# Altium PCB 6C-2L-1550um.PcbDoc
Units mm, origin at the board's own origin, x right, y up, seen from the top; angles counter-clockwise.
Board outline 30 x 15 mm, 2 copper layers (Top Layer, Bottom Layer), stack 1.586 mm thick; 3 components, 4 nets, 12 pads, 0 vias.
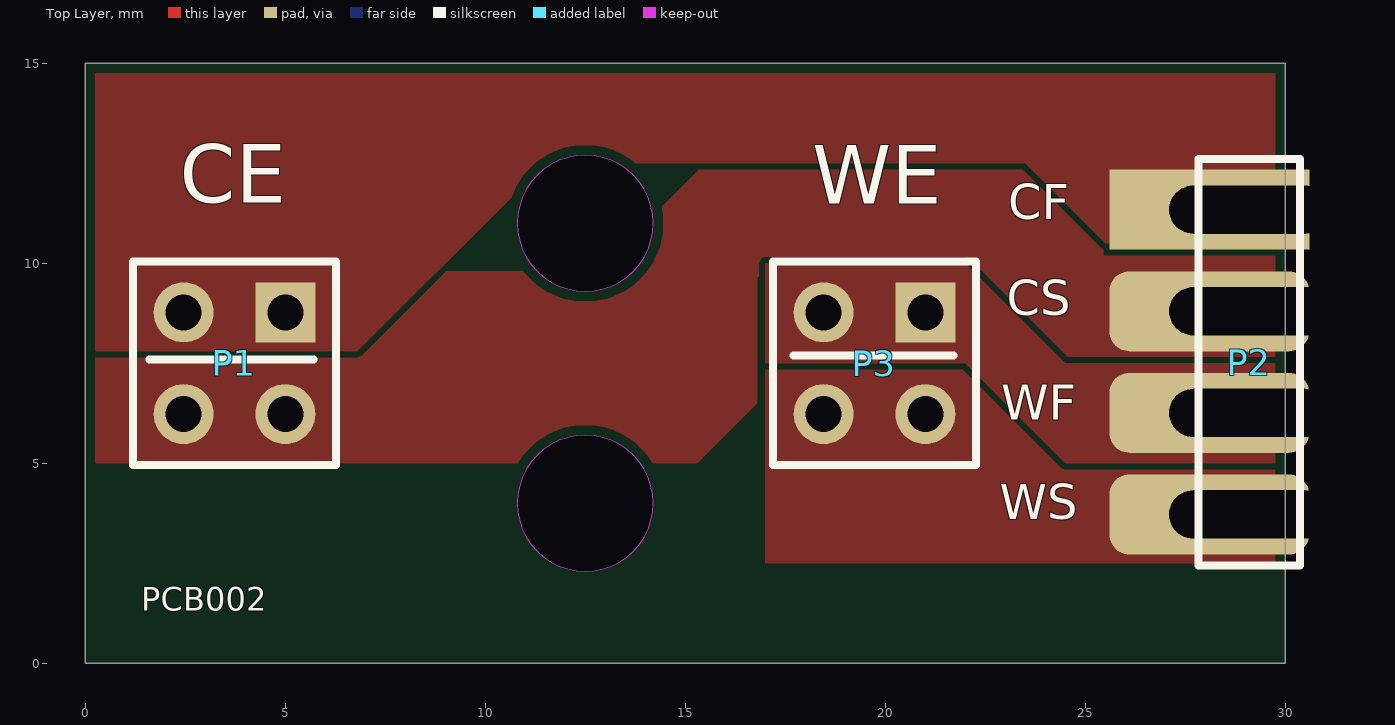
[diagram p0: Top Layer view]
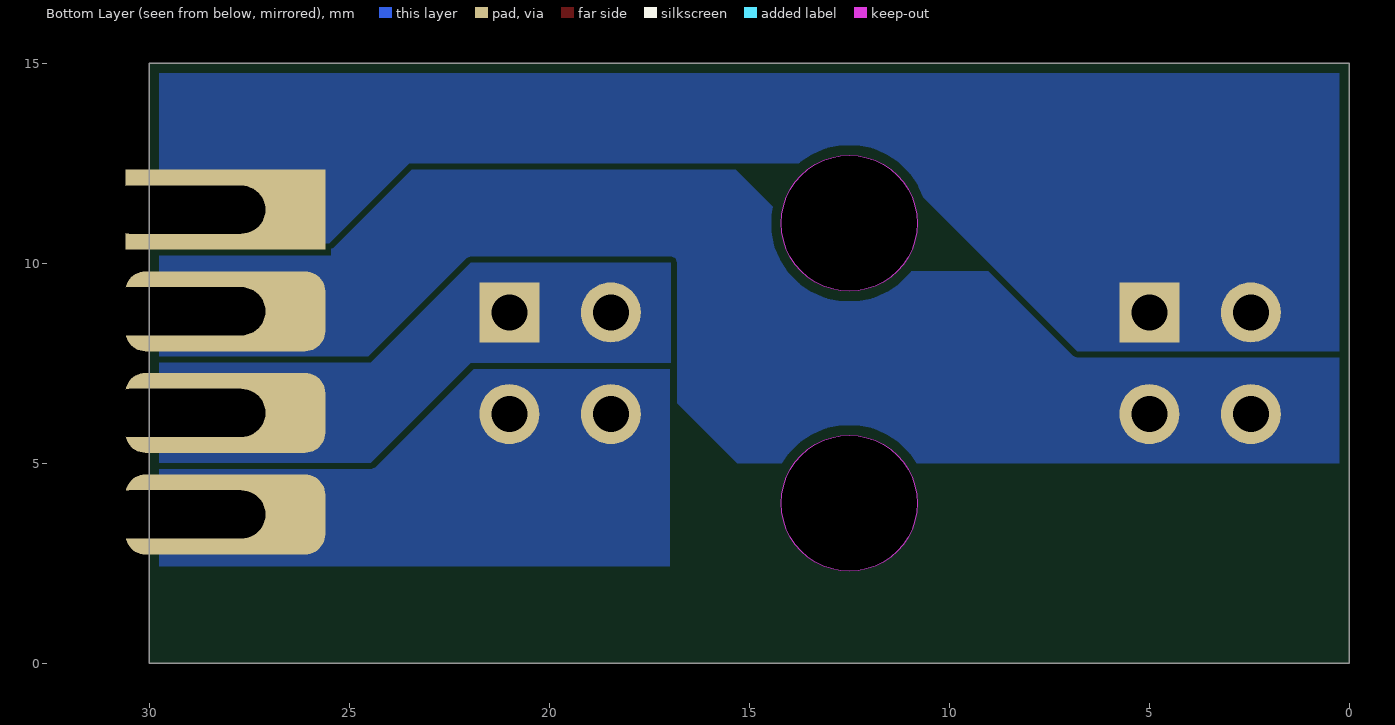
[diagram p1: Bottom Layer view, seen from below]

## Layer stack, top to bottom
Top Solder: solder mask 0.0102, Solder Resist, Dk 3.5
Top Layer: signal copper 0.018
Dielectric1: core 1.55, FR-4, Dk 4.8
Bottom Layer: signal copper 0.018
Bottom Solder: solder mask 0.0102, Solder Resist, Dk 3.5

## Board outline
0,0 30,0 30,15 0,15
cut-out: 10.8,11 ccw(c12.5,11) 12.5,9.3 ccw(c12.5,11) 14.2,11 ccw(c12.5,11) 12.5,12.7 ccw(c12.5,11)
cut-out: 10.8,4 ccw(c12.5,4) 12.5,2.3 ccw(c12.5,4) 14.2,4 ccw(c12.5,4) 12.5,5.7 ccw(c12.5,4)

## Design rules (kind name [scope] priority, off if disabled: settings)
BoardOutlineClearance [All] p1: gap=0.25 ignorepadtopadclearanceinfootprint=FALSE except(0: Arc-SplitContinuation Track-SplitContinuation SMDPad-SplitContinuation THPad-SplitContinuation Via-SplitContinuation Fill-SplitContinuation Poly-SplitContinuation Region-SplitContinuation Text-SplitContinuation)
Clearance Clearance-xPP-xTP-xTT [All] p1: gap=0.15 ignorepadtopadclearanceinfootprint=FALSE except(0: Arc-Hole Track-Hole SMDPad-Hole THPad-Hole Via-Hole Fill-Hole Poly-Hole Region-Hole Text-Hole)
ComponentClearance [All] p1: gap=0.25 collisioncheckmode=3 verticalgap=0.25 showdistances=FALSE
DiffPairsRouting [All] p1: maxlimit=0.25 minlimit=0.25 mostfreqgap=0.25 toplayer_minwidth=0.381 toplayer_maxwidth=0.381 toplayer_prefwidth=0.381 bottomlayer_minwidth=0.381 bottomlayer_maxwidth=0.381 bottomlayer_prefwidth=0.381 maxuncoupledlength=12.5
Height [All] p1: minheight=0 maxheight=25 prefheight=12.5
HoleSize HoleSize-PTH [All] p1: absolutevalues=TRUE maxlimit=2 minlimit=0.25 maxpercent=80.000 minpercent=20.000
HoleToHoleClearance [All] p1: gap=0.35 allowstackedmicrovias=TRUE
MinimumAnnularRing "Minimum IAR  >0.45mm" [((ObjectKind = 'Pad') OR (ObjectKind = 'Via')) And (Layer = 'MultiLayer') And (HoleDiameter > AsMM(0.45))] p1: minimumring=0.175 // minimum inner annular ring for pads > 0.45mm finished hole size
MinimumAnnularRing "Minimum IAR <=0.45mm" [((ObjectKind = 'Pad') OR (ObjectKind = 'Via')) And (Layer = 'MultiLayer') And (HoleDiameter <= AsMM(0.45))] p2: minimumring=0.175 // minimum inner annular ring for pads <= 0.45mm finished hole size
MinimumSolderMaskSliver [All] p1: minsoldermaskwidth=0.08
PlaneClearance PlaneClearance-IPI [All] p1: clearance=0.25
PlaneConnect [All] p1: planeconnectstyle=Relief reliefexpansion=0.175 reliefentries=4 reliefconductorwidth=0.2 reliefairgap=0.2
PolygonConnect PolygonConnect-xTW [All] p1: connectstyle=Direct reliefconductorwidth=0.2 reliefentries=4 polygonreliefangle="90 Angle" airgapwidth=0.2
RoutingCorners [All] p1: cornerstyle=45-Degree minsetback=2.5 maxsetback=2.5
RoutingVias "RoutingVias > 0.45mm" [(ObjectKind = 'Via') And (HoleDiameter > AsMM(0.45))] p1: holewidth=0.5 width=0.85 viastyle="Through Hole" minholewidth=0.5 minwidth=0.85 maxholewidth=0.9 maxwidth=1.25 // finishet hole size > 0.45mm
RoutingVias "RoutingVias <= 0.45mm" [(ObjectKind = 'Via') And (HoleDiameter <= AsMM(0.45))] p2: holewidth=0.3 width=0.65 viastyle="Through Hole" minholewidth=0.25 minwidth=0.6 maxholewidth=0.45 maxwidth=0.8 // finishet hole size <= 0.45mm
SilkToSilkClearance [All] p1: silktosilkclearance=0.2
SilkToSolderMaskClearance SilkscreenOverComponentPads [IsPad] p1: minsilkscreentomaskgap=0.2 clearancetoexposedcopper=TRUE
SolderMaskExpansion [All] p1: expansion=0 istentingtop=FALSE
UnRoutedNet [All] p1: checkbadconnections=TRUE
Width Width-xTW [All] p1: maxlimit=1.5 minlimit=0.15 preferedwidth=0.2
18 further rules are at their usual default settings.

## Components (designator, comment, footprint, x,y, rotation, side; value= is the part's Value field where it differs from the comment)
P1 "Header 2X2" HDR2X2 5,8.77 r180 top
P2 "Header 4" HDR1X4 29.1,11.34 r270 top
P3 "Header 2X2" HDR2X2 21,8.77 r180 top

## Footprints (in the part's own frame and the unit in brackets; to place one, negate y for a bottom-side part, rotate by r counter-clockwise, add the part's x,y. Pads: shape width x height; smd on the part's side, far side on the other; paste and mask are expansions set on the pad)
HDR1X4 [mm] "Connector; Header; 4 Position"
  rect 2x5 hole 1.2 slot 4 at 90 deg copper offset 0,-1: 1(0,0)
  rrect50% 2x5 hole 1.2 slot 4 at 90 deg copper offset 0,-1: 2(2.54,0) 3(5.08,0) 4(7.62,0)
  silkscreen extent -1.27,-1.27 8.89,1.27
HDR2X2 [mm] "Connector; Header; 2x2 Position"
  rect 1.5x1.5 hole 0.9: 1(0,0)
  round 1.5 hole 0.9: 2(0,2.54) 3(2.54,0) 4(2.54,2.54)
  silkscreen extent -1.27,-1.27 3.81,3.81

## Part data
P1 P3: "Header, 2-Pin, Dual row", LatestRevisionDate=17-Jul-2002, LatestRevisionNote="Re-released for DXP Platform.", Publisher="Altium Limited"
P2: "Header, 4-Pin", LatestRevisionDate=17-Jul-2002, LatestRevisionNote="Re-released for DXP Platform.", Publisher="Altium Limited"

## Nets (pads, with @x,y where several pads share a name; then routed paths per layer and width w, separated by ;. In a path a pad name is that pad's centre, name@x,y a point inside that pad or via, vN(x,y) a via of type N, cw(c..) or ccw(c..) an arc to the next point about the centre after c; other vN are vias at no path point)
Coin1_Force: P1.1 P1.3 P2.1
Coin1_Sense: P1.2 P1.4 P2.2
Coin2_Force: P2.3 P3.1 P3.3
Coin2_Sense: P2.4 P3.2 P3.4

## Polygon pours and split planes (outlines as drawn)
Coin1_Sense on Top Layer "NONET_L-01_P-001" (solid, pour order 8): 0.255,7.662 6.433,7.662 8.57,9.8 12.8,9.8 15.662,12.662 23.531,12.662 25.593,10.6 30.6,10.6 30.6,7.6 30.338,7.338 24.433,7.338 21.933,9.838 17,9.838 16.8,9.638 16.8,6.5 15.3,5 -0.6,5 -0.6,7.6 -0.7,7.7
Coin1_Force on Top Layer "NONET_L-01_P-001" (solid, pour order 4): 0,7.8 6.8,7.8 11.5,12.5 23.5,12.5 25.5,10.5 31.5,10.5 31.5,15.5 0,15.5
Coin2_Sense on Top Layer "NONET_L-01_P-001" (solid, pour order 3): 17,7.5 17,2.5 31.5,2.5 31.5,5 24.5,5 22,7.5
Coin2_Force on Top Layer "NONET_L-01_P-001" (solid, pour order 2): 17,10 17,7.5 22,7.5 24.5,5 31.5,5 31.5,7.5 24.5,7.5 22,10
Coin1_Sense on Bottom Layer "NONET_L-01_P-001" (solid, pour order 9): 0.255,7.662 6.433,7.662 8.57,9.8 12.8,9.8 15.662,12.662 23.531,12.662 25.593,10.6 30.6,10.6 30.6,7.6 30.338,7.338 24.433,7.338 21.933,9.838 17,9.838 16.8,9.638 16.8,6.5 15.3,5 -0.6,5 -0.6,7.6 -0.7,7.7
Coin2_Sense on Bottom Layer "NONET_L-01_P-001" (solid, pour order 7): 16.991,7.42 16.991,2.42 31.491,2.42 31.491,4.92 24.491,4.92 21.991,7.42
Coin2_Force on Bottom Layer "NONET_L-01_P-001" (solid, pour order 6): 16.958,10.017 16.958,7.517 21.958,7.517 24.458,5.017 31.458,5.017 31.458,7.517 24.458,7.517 21.958,10.017
Coin1_Force on Bottom Layer "NONET_L-01_P-001" (solid, pour order 0): 0,7.8 6.8,7.8 11.5,12.5 23.5,12.5 25.5,10.5 31.5,10.5 31.5,15.5 0,15.5

## Silkscreen, mask and mechanical layers (free items; w line width, h text height)
Top Overlay:
  lines w0.2: 1.6,7.6 5.7,7.6 ; 17.7,7.7 21.7,7.7
  text "CE" at 2.362,11.028 h2.5
  text "WE" at 18.17,11 h2.5
  text "CF" at 23.07,10.817 h1.5
  text "CS" at 23.037,8.417 h1.5
  text "WF" at 22.895,5.8 h1.5
  text "WS" at 22.863,3.317 h1.5
  text "PCB002" at 1.393,1.111 h1
Dimensions:
  the board outline again, w0.2